# Allegro board ex2_rlc.brd
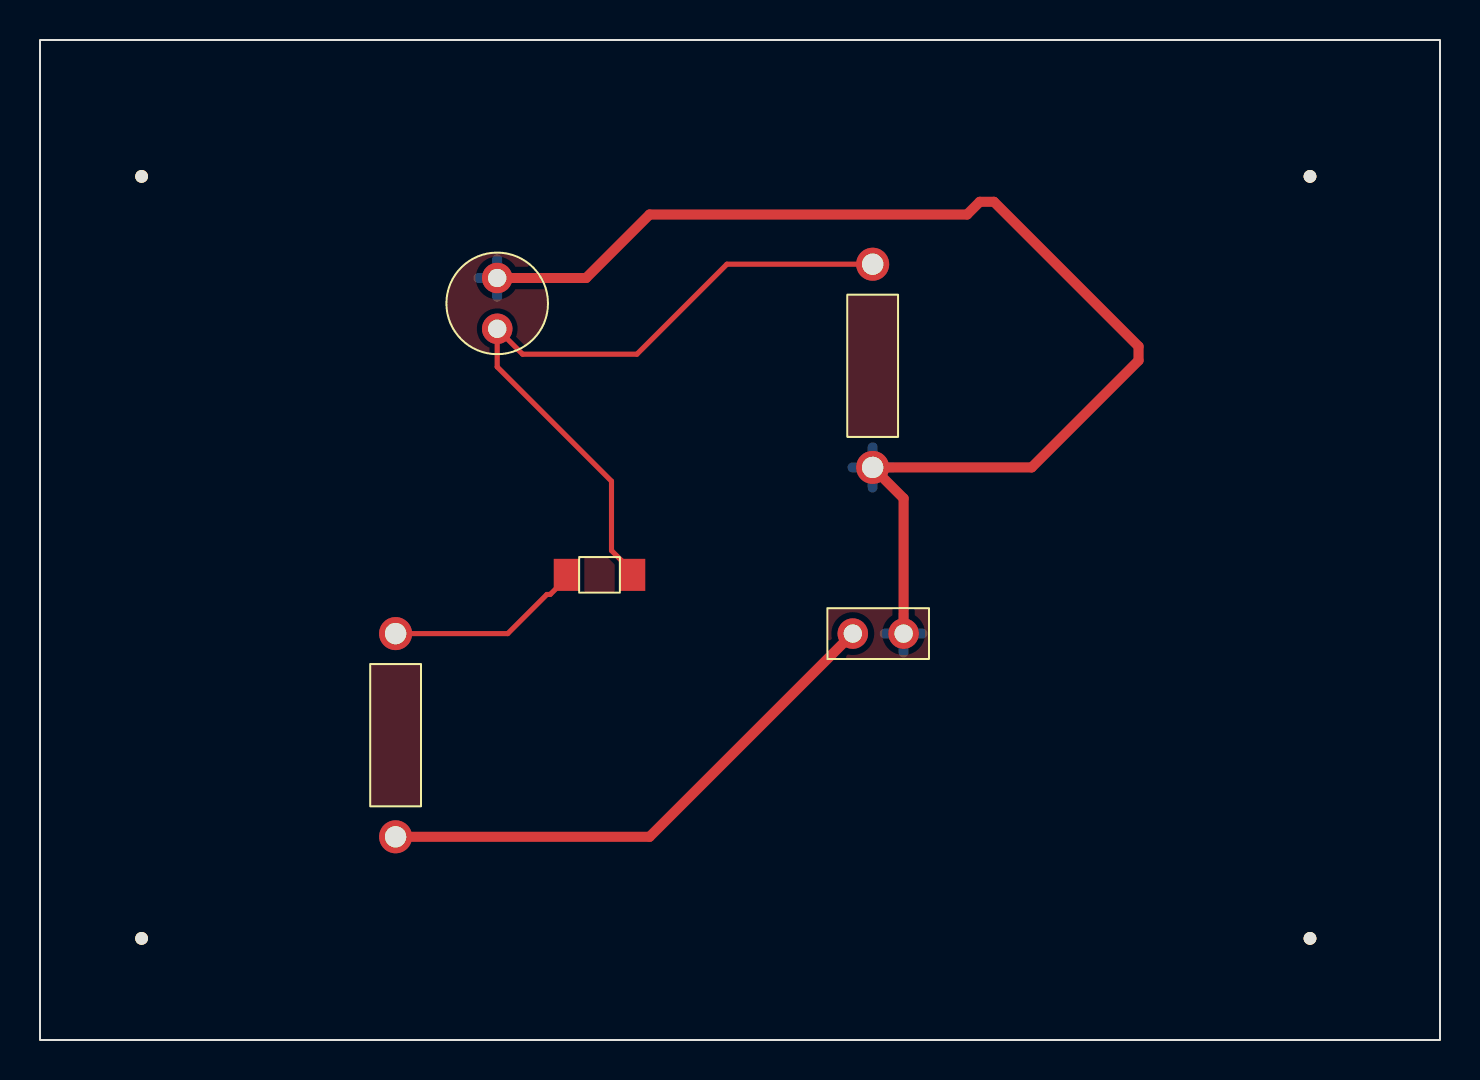
[diagram p0: board, top side]
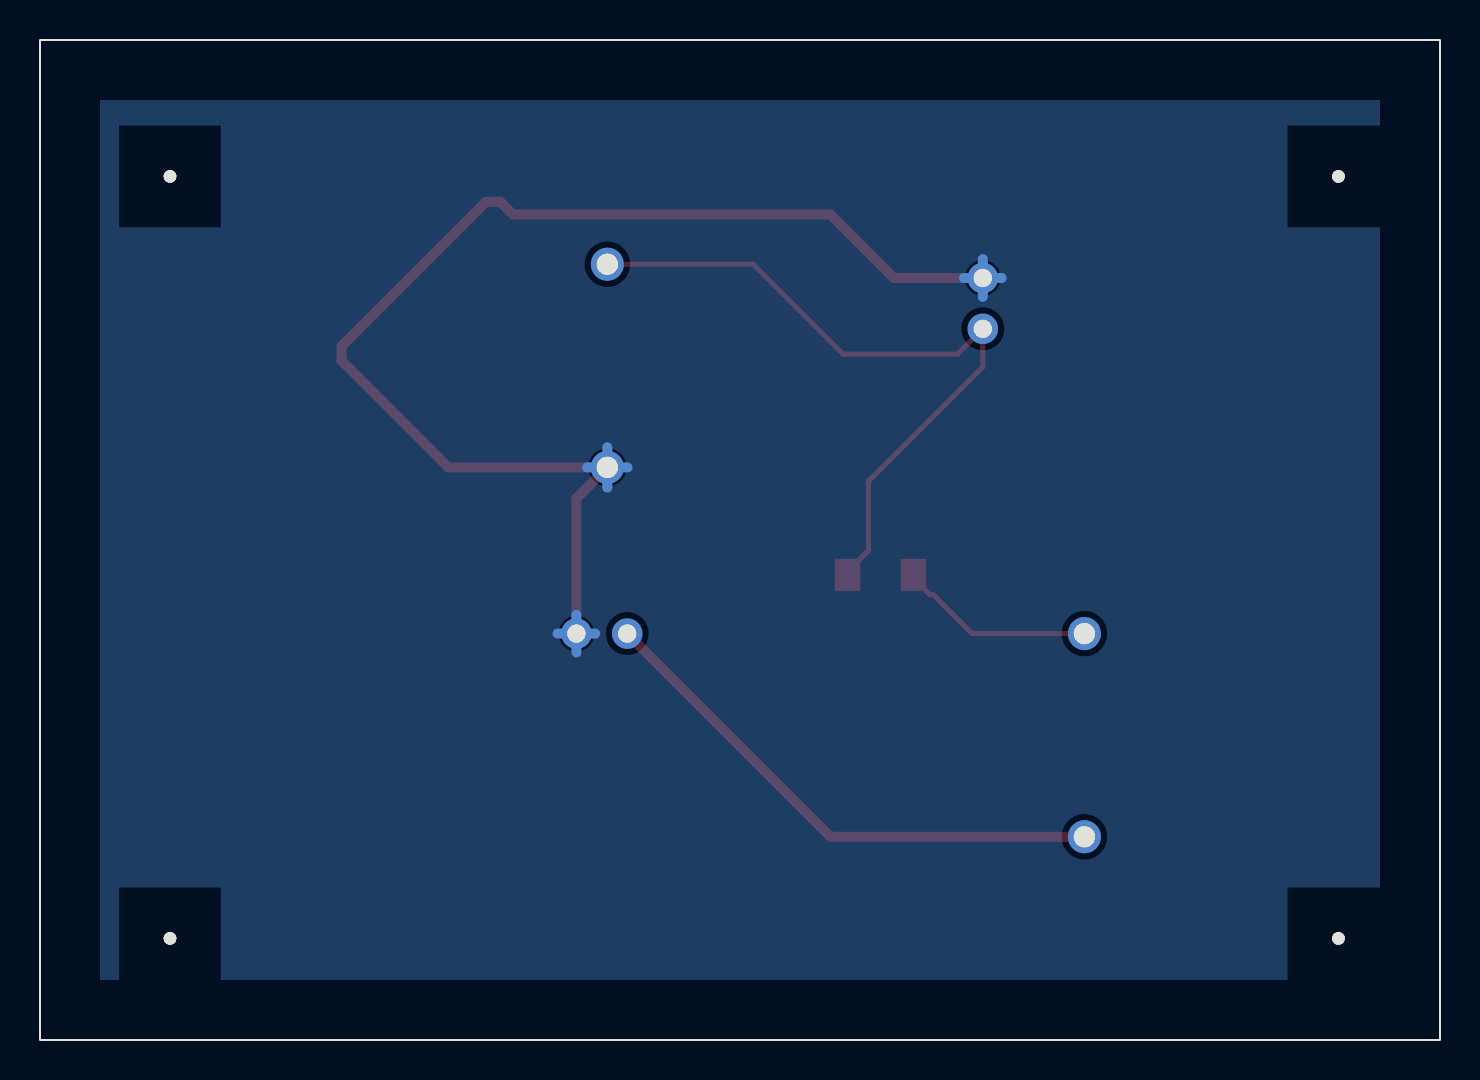
[diagram p1: board, bottom side, seen from below]

Outline 70 x 50 mm; copper layers: TOP, BOTTOM. Coordinates in mm from the lower left corner of the outline.
Outline path: rectangle 0,0 70,50

## Design rules (mm)
net group BASENETS: nets KKK N00192
net group POWERNETS: nets VCC
nets with their own width: min track width 0.5; nets GND

## Placement (name value [footprint] x y rotation side)
C1  1u  [CAP196]  22.86 35.56 0 top
J1  CON2  [JUMPER2]  40.64 20.32 0 top
L1  100n  [SMDRES]  27.98 23.26 0 top
NOREF  -  [unnamed]  63.5 43.18 0 top
NOREF#2  -  [unnamed]  5.08 43.18 0 top
NOREF#3  -  [unnamed]  63.5 5.08 0 top
NOREF#4  -  [unnamed]  5.08 5.08 0 top
R1  250  [RES400]  17.78 10.16 0 top
R2  250  [RES400]  41.63 28.63 0 top

## Library data of the parts
C1 = CAP NP: Tolerance: ***; User Part Number: ***
J1 = CON2: User Part Number: ***
L1 = INDUCTOR: Tolerance: ***; User Part Number: ***
R1 R2 = R: Tolerance: ***; User Part Number: ***

## Footprints (pads in the part's own frame, mm; a bottom-side part is the same pattern mirrored in y, then rotated)
CAP196
  round 1.524 hole 0.914: 1(0,0) 2(0,2.54)
JUMPER2
  round 1.524 hole 0.914: 1(0,0) 2(2.54,0)
RES400
  round 1.651 hole 1.067: 1(0,0) 2(0,10.16)
SMDRES
  rect 1.27x1.6 smd: 1(-1.651,0) 2(1.651,0)
unnamed
  round 0.635 hole 3.175 unplated: (0,0)

## Nets
GND: C1.2 J1.2 R2.1
VCC: J1.1 R1.1
KKK: L1.1 R1.2
N00192: C1.1 L1.2 R2.2

## Routing (per net, layer and track width the routed paths; a pad name or vN(x,y) marks a point on that pad's centre or on a via; arc(x,y) is an arc through that point)
GND: length 73.4
  TOP w0.5: C1.2 27.3,38.1 30.48,41.27 46.35,41.27 46.99,41.91 47.7,41.91 54.93,34.68 54.93,33.97 49.58,28.63 R2.1 43.18,27.08 J1.2
  BOTTOM w0.5: C1.2 22.86,39.04 ; C1.2 23.8,38.1 ; C1.2 21.92,38.1 ; C1.2 22.86,37.16 ; R2.1 42.64,28.63 ; R2.1 41.63,29.64 ; R2.1 40.63,28.63 ; R2.1 41.63,27.62 ; 43.18,19.38 J1.2 ; J1.2 44.12,20.32 ; J1.2 43.18,21.26 ; J1.2 42.24,20.32
VCC: length 27.1
  TOP w0.5: R1.1 30.48,10.16 J1.1
KKK: length 9.9
  TOP w0.254: R1.2 23.39,20.32 25.34,22.28 25.51,22.28 26.32,23.09 L1.1
N00192: length 36.3
  TOP w0.254: R2.2 34.34,38.79 29.84,34.29 24.13,34.29 C1.1 22.86,33.66 28.57,27.94 28.57,24.47 29.63,23.42 L1.2

## Copper pours and planes (outline as drawn; the poured copper is in the pictures)
GND on BOTTOM: 3,47 67,47 67,3 3,3
Net_2 on TOP: 40.36,30.15 40.36,37.27 42.9,37.27 42.9,30.15
Net_3 on TOP: 39.37,19.05 39.37,21.59 44.45,21.59 44.45,19.05
Net_4 on TOP: 26.96,22.37 26.96,24.15 28.99,24.15 28.99,22.37
Net_5 on TOP: 20.32,36.83 25.4,36.83
Net_6 on TOP: 16.51,11.68 16.51,18.8 19.05,18.8 19.05,11.68
